# Altium PCB IPG_Rigid.PcbDoc (part 5 of 13)
Units mm, origin at the board's own origin, x right, y up, seen from the top; angles counter-clockwise.
Board outline 69.6 x 90.73 mm, 10 copper layers (TOP, DHOR, DVERT, GND 1, POWER, GND 2, GND 3, AVERT, AHOR, BOT), stack 1.198 mm thick; 745 components, 398 nets, 1997 pads, 2678 vias.
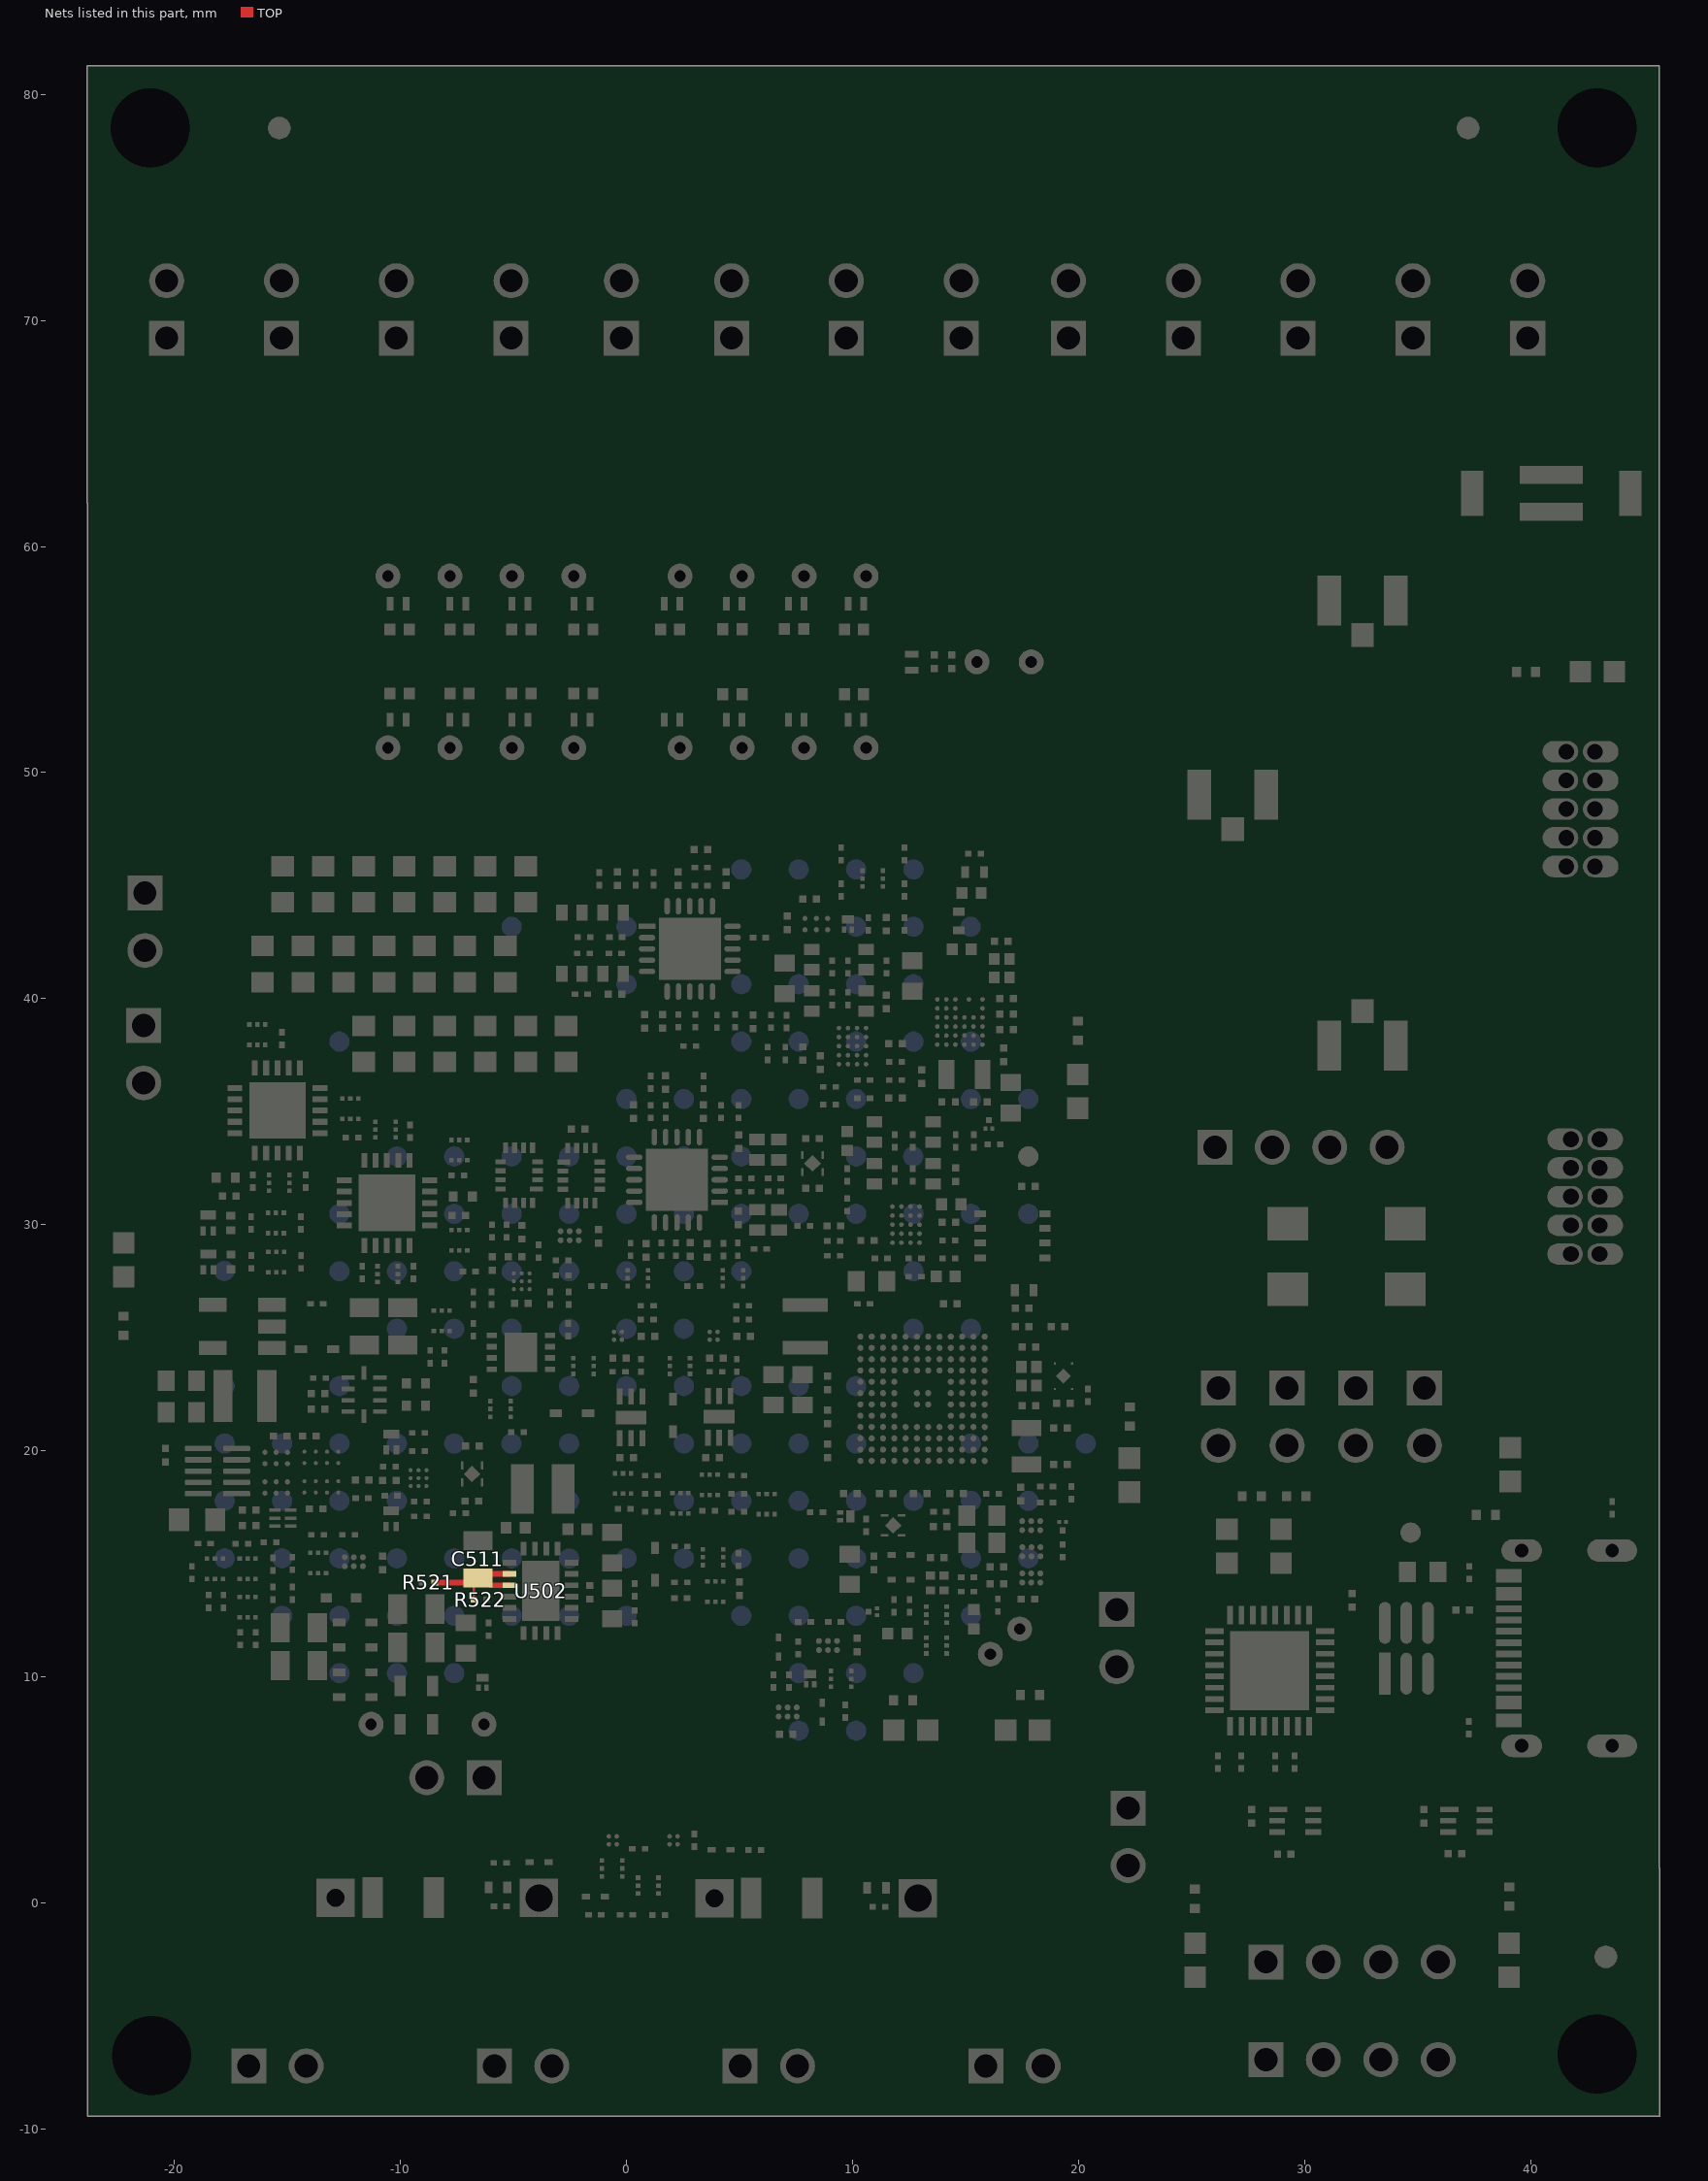
[diagram p11: the nets of this part, all layers, seen from the top]

## Part data (continued)
R502: "402 Ohms ±0.5% 0.4W Chip Resistor 0603 (1608 Metric) Automotive AEC-Q200, Pulse Withstanding Thick Film", Case/Package=0603, Manufacturer=Vishay, Max Operating Temperature=155°C, Min Operating Temperature=-55°C, Package Shape=Rectangular, Power=400mW, Supplier Part Number 1=846-SDR03EZPD4020CT-ND, Tolerance=0.5%, Category="Chip SMD Resistors", ComponentLink1Description=https://datasheet.ciiva.com:443/pdfs/VipMasterIC/IC/VISH/VISH-S-A0002932828/VISH-S-A0002932828-1.pdf?src-supplier=IHS+Markit, ComponentLink1URL=https://datasheet.ciiva.com:443/pdfs/VipMasterIC/IC/VISH/VISH-S-A0002932828/VISH-S-A0002932828-1.pdf?src-supplier=IHS+Markit, ComponentLink2Description=https://datasheet.ciiva.com/2471/crcw0201e3-2471712.pdf?src-supplier=Digikey, ComponentLink2URL=https://datasheet.ciiva.com/2471/crcw0201e3-2471712.pdf?src-supplier=Digikey, ComponentLink3Description=https://datasheet.ciiva.com/7841/1719906-7841431.pdf?src-supplier=Element14, ComponentLink3URL=https://datasheet.ciiva.com/7841/1719906-7841431.pdf?src-supplier=Element14, ComponentLink4Description=https://datasheet.ciiva.com/7841/1719906-7841430.pdf?src-supplier=Element14, ComponentLink4URL=https://datasheet.ciiva.com/7841/1719906-7841430.pdf?src-supplier=Element14, ComponentLink5Description=https://datasheet.ciiva.com/22665/1847332-22665688.pdf?src-supplier=Element14, ComponentLink5URL=https://datasheet.ciiva.com/22665/1847332-22665688.pdf?src-supplier=Element14, ComponentLink6Description=https://datasheet.ciiva.com/2471/crcw0201e3-2471713.pdf?src-supplier=Digikey, ComponentLink6URL=https://datasheet.ciiva.com/2471/crcw0201e3-2471713.pdf?src-supplier=Digikey, ComponentLink7Description=https://datasheet.ciiva.com/2471/crcw0201e3-2471711.pdf?src-supplier=Digikey, ComponentLink7URL=https://datasheet.ciiva.com/2471/crcw0201e3-2471711.pdf?src-supplier=Digikey, ComponentLink8Description=https://datasheet.ciiva.com/16757/70202042-16757849.pdf?src-supplier=Allied+Electronics, ComponentLink8URL=https://datasheet.ciiva.com/16757/70202042-16757849.pdf?src-supplier=Allied+Electronics, ComponentLink9Description=https://datasheet.ciiva.com/16436/crcw0201e3-16436237.pdf?src-supplier=Future+Electronics, ComponentLink9URL=https://datasheet.ciiva.com/16436/crcw0201e3-16436237.pdf?src-supplier=Future+Electronics, Construction=Chip, Manufacturer Part Number=SDR03EZPD4020, Mounting Technology="Surface Mount", Pins=2, RoHS=Yes, Supplier 1=DigiKey, Terminal Finish=Nickel
R505: "Fixed Resistor, Metal Glaze/thick Film, 0.05W, 2000ohm, 30V, 1% +/-Tol, 200ppm/Cel, Surface Mount, 0201", Case/Package=0201, Manufacturer="Vishay Dale", Max Operating Temperature=155°C, Medical Grade MFR=Mini-Systems, Medical Grade MFR PN=MWA96SM-4021F-NS62TR, Min Operating Temperature=-55°C, Package Height=0.23mm, Package Length=0.6mm, Package Shape=Rectangular, Package Style=SMTMeter, Package Width=0.3mm, Power=50mW, Rated Temperature=70°C, Resistor Type="FIXED RESISTOR", Supplier Part Number 1=541-2.00KABCT-ND, Temperature Coefficient=200ppm/°C, Tolerance=1%, Working Voltage=30V, Category="Chip SMD Resistors", ComponentLink1Description=https://datasheet.ciiva.com:443/pdfs/VipMasterIC/IC/VISH/VISH-S-A0002932828/VISH-S-A0002932828-1.pdf?src-supplier=IHS+Markit, ComponentLink1URL=https://datasheet.ciiva.com:443/pdfs/VipMasterIC/IC/VISH/VISH-S-A0002932828/VISH-S-A0002932828-1.pdf?src-supplier=IHS+Markit, ComponentLink2Description=https://datasheet.ciiva.com/7690/1719906-7690620.pdf?src-supplier=Element14, ComponentLink2URL=https://datasheet.ciiva.com/7690/1719906-7690620.pdf?src-supplier=Element14, ComponentLink3Description=https://datasheet.ciiva.com/7690/1719906-7690621.pdf?src-supplier=Element14, ComponentLink3URL=https://datasheet.ciiva.com/7690/1719906-7690621.pdf?src-supplier=Element14, ComponentLink4Description=https://datasheet.ciiva.com/9074/crcw0201e3-9074873.pdf?src-supplier=Avnet, ComponentLink4URL=https://datasheet.ciiva.com/9074/crcw0201e3-9074873.pdf?src-supplier=Avnet, ComponentLink5Description=https://datasheet.ciiva.com/22675/1700795-22675166.pdf?src-supplier=Element14, ComponentLink5URL=https://datasheet.ciiva.com/22675/1700795-22675166.pdf?src-supplier=Element14, Construction=Chip, JESD-609 Code=e3, Manufacturer Part Number=CRCW02012K00FNED, Mounting Technology="Surface Mount", Packaging="Tape and Reel", Pins=2, Pricing="1=0,1, 10=0,037, 50=0,0242, 100=0,0204, 500=0,01426, 1000=0,01241, 5000=0,00924 (USD)", Reach SVHC Compliant=Yes, Reference Standard=AEC-Q200, RoHS=Yes, RoHS Compliant=Yes, Stock=14472, Supplier 1=Digikey, Technology="METAL GLAZE/THICK FILM", Terminal Finish=Nickel, Termination=Wraparound
R508: "150 kOhms ±1% 0.05W, 1/20W Chip Resistor 0201 (0603 Metric) Thick Film", Case/Package=0201, Manufacturer="Vishay Dale", Max Operating Temperature=155°C, Min Operating Temperature=-55°C, Package Shape=Rectangular, Power="50 mW", Rated Temperature="70 °C", Resistor Type="FIXED RESISTOR", Supplier Part Number=541-2943-2-ND, Supplier Part Number 1=71-CRCW0201150KFKED, Temperature Coefficient=±100ppm/°C, Tolerance=1%, Category="Chip SMD Resistors", JESD-609 Code=e3, Manufacturer Part Number=CRCW0201150KFKED, Mounting Technology="Surface Mount", Packaging="Tape and Reel", Pins=2, Reach SVHC Compliant=Yes, RoHS=Yes, RoHS Compliant=Yes, Stock=109k, Supplier=Digikey, Supplier 1=Mouser
R509: "Fixed Resistor, Metal Glaze/thick Film, 0.05W, 2400000ohm, 30V, 1% +/-Tol, 200ppm/Cel, Surface Mount, 0201", Case/Package=0201, Manufacturer="Vishay Draloric", Max Operating Temperature=155°C, Medical Grade MFR=TBD, Min Operating Temperature=-55°C, Package Shape=Rectangular, Power=50mW, Rated Temperature=70°C, Resistor Type="FIXED RESISTOR", Supplier Part Number=541-CRCW02011M80FNEDCT-ND, Supplier Part Number 1=541-CRCW02012M40FNEDCT-ND, Temperature Coefficient=200ppm/°C, Tolerance=1%, Working Voltage=30V, Category="Chip SMD Resistors", ComponentLink1Description=https://datasheet.ciiva.com:443/pdfs/VipMasterIC/IC/VISH/VISH-S-A0002932828/VISH-S-A0002932828-1.pdf?src-supplier=IHS+Markit, ComponentLink1URL=https://datasheet.ciiva.com:443/pdfs/VipMasterIC/IC/VISH/VISH-S-A0002932828/VISH-S-A0002932828-1.pdf?src-supplier=IHS+Markit, ComponentLink2Description=https://datasheet.ciiva.com/7800/1719906-7800925.pdf?src-supplier=Element14, ComponentLink2URL=https://datasheet.ciiva.com/7800/1719906-7800925.pdf?src-supplier=Element14, ComponentLink3Description=https://datasheet.ciiva.com/7800/1719906-7800926.pdf?src-supplier=Element14, ComponentLink3URL=https://datasheet.ciiva.com/7800/1719906-7800926.pdf?src-supplier=Element14, ComponentLink4Description=https://datasheet.ciiva.com/22675/1700795-22675997.pdf?src-supplier=Element14, ComponentLink4URL=https://datasheet.ciiva.com/22675/1700795-22675997.pdf?src-supplier=Element14, ComponentLink5Description=https://datasheet.ciiva.com/22692/1719906-22692765.pdf?src-supplier=Element14, ComponentLink5URL=https://datasheet.ciiva.com/22692/1719906-22692765.pdf?src-supplier=Element14, JESD-609 Code=e3, Manufacturer Part Number=CRCW02012M40FNED, Medical Grade MFR PN=TBD, Mounting Technology="Surface Mount", Packaging="Tape and Reel", Pins=2, Pricing="1=0,1, 10=0,037, 50=0,0242, 100=0,0204, 500=0,01426, 1000=0,01241, 5000=0,00924 (USD)", Reach SVHC Compliant=Yes, RoHS=Yes, RoHS Compliant=Yes, Stock=32348, Supplier=Digikey, Supplier 1=Digikey, Technology="METAL GLAZE/THICK FILM", Terminal Finish=Nickel, Termination=Wraparound
R510 R511: "Fixed Resistor, Metal Glaze/thick Film, 0.05W, 1600000ohm, 30V, 1% +/-Tol, 200ppm/Cel, Surface Mount, 0201", Case/Package=0201, Manufacturer="Vishay Dale", Max Operating Temperature=155°C, Medical Grade MFR=TBD, Min Operating Temperature=-55°C, Package Shape=Rectangular, Power=50mW, Rated Temperature=70°C, Resistor Type="FIXED RESISTOR", Supplier Part Number 1=541-CRCW02011M60FNEDCT-ND, Temperature Coefficient=200ppm/°C, Tolerance=1%, Working Voltage=30V, Category="Chip SMD Resistors", ComponentLink1Description=https://datasheet.ciiva.com:443/pdfs/VipMasterIC/IC/VISH/VISH-S-A0002932828/VISH-S-A0002932828-1.pdf?src-supplier=IHS+Markit, ComponentLink1URL=https://datasheet.ciiva.com:443/pdfs/VipMasterIC/IC/VISH/VISH-S-A0002932828/VISH-S-A0002932828-1.pdf?src-supplier=IHS+Markit, ComponentLink2Description=https://datasheet.ciiva.com/7800/1719906-7800925.pdf?src-supplier=Element14, ComponentLink2URL=https://datasheet.ciiva.com/7800/1719906-7800925.pdf?src-supplier=Element14, ComponentLink3Description=https://datasheet.ciiva.com/7800/1719906-7800926.pdf?src-supplier=Element14, ComponentLink3URL=https://datasheet.ciiva.com/7800/1719906-7800926.pdf?src-supplier=Element14, ComponentLink4Description=https://datasheet.ciiva.com/22675/1700795-22675997.pdf?src-supplier=Element14, ComponentLink4URL=https://datasheet.ciiva.com/22675/1700795-22675997.pdf?src-supplier=Element14, ComponentLink5Description=https://datasheet.ciiva.com/22692/1719906-22692765.pdf?src-supplier=Element14, ComponentLink5URL=https://datasheet.ciiva.com/22692/1719906-22692765.pdf?src-supplier=Element14, JESD-609 Code=e3, Manufacturer Part Number=CRCW02011M60FNED, Medical Grade MFR PN=TBD, Mounting Technology="Surface Mount", Packaging="Tape and Reel", Pins=2, Pricing="1=0,1, 10=0,037, 50=0,0242, 100=0,0204, 500=0,01426, 1000=0,01241, 5000=0,00924 (USD)", Reach SVHC Compliant=Yes, RoHS=Yes, RoHS Compliant=Yes, Stock=32348, Supplier 1=Digikey, Technology="METAL GLAZE/THICK FILM", Terminal Finish=Nickel, Termination=Wraparound
R512 R700 R914 R1028 R1059: "Fixed Resistor, Metal Glaze/thick Film, 0.05W, 100000ohm, 30V, 1% +/-Tol, 200ppm/Cel, Surface Mount, 0201", Case/Package=0201, Manufacturer=Vishay, Max Operating Temperature=155°C, Medical Grade MFR=Mini-Systems, Medical Grade MFR PN=MWA96SM-1003F-NS62TR, Min Operating Temperature=-55°C, Package Height=0.23mm, Package Length=0.6mm, Package Shape=Rectangular, Package Style=SMTMeter, Package Width=0.3mm, Power=50mW, Rated Temperature=70°C, Resistor Type="FIXED RESISTOR", Supplier Part Number=541-100KABCT-ND, Temperature Coefficient=200ppm/°C, Tolerance=1%, Working Voltage=30V, Category="Chip SMD Resistors", ComponentLink1Description=https://datasheet.ciiva.com:443/pdfs/VipMasterIC/IC/VISH/VISH-S-A0002932828/VISH-S-A0002932828-1.pdf?src-supplier=IHS+Markit, ComponentLink1URL=https://datasheet.ciiva.com:443/pdfs/VipMasterIC/IC/VISH/VISH-S-A0002932828/VISH-S-A0002932828-1.pdf?src-supplier=IHS+Markit, ComponentLink2Description=https://datasheet.ciiva.com/2474/crcw0201e3-2474797.pdf?src-supplier=Digikey, ComponentLink2URL=https://datasheet.ciiva.com/2474/crcw0201e3-2474797.pdf?src-supplier=Digikey, ComponentLink3Description=https://datasheet.ciiva.com/2474/crcw0201e3-2474798.pdf?src-supplier=Digikey, ComponentLink3URL=https://datasheet.ciiva.com/2474/crcw0201e3-2474798.pdf?src-supplier=Digikey, ComponentLink4Description=https://datasheet.ciiva.com/2474/crcw0201e3-2474799.pdf?src-supplier=Digikey, ComponentLink4URL=https://datasheet.ciiva.com/2474/crcw0201e3-2474799.pdf?src-supplier=Digikey, ComponentLink5Description=https://datasheet.ciiva.com/16436/dcrcwe3-16436220.pdf?src-supplier=Future+Electronics, ComponentLink5URL=https://datasheet.ciiva.com/16436/dcrcwe3-16436220.pdf?src-supplier=Future+Electronics, ComponentLink6Description=https://datasheet.ciiva.com/28634/1847332-28634462.pdf?src-supplier=Element14, ComponentLink6URL=https://datasheet.ciiva.com/28634/1847332-28634462.pdf?src-supplier=Element14, ComponentLink7Description=https://datasheet.ciiva.com/22665/1700795-22665689.pdf?src-supplier=Element14, ComponentLink7URL=https://datasheet.ciiva.com/22665/1700795-22665689.pdf?src-supplier=Element14, ComponentLink8Description=https://datasheet.ciiva.com/22870/70202042-22870476.pdf?src-supplier=Allied+Electronics, ComponentLink8URL=https://datasheet.ciiva.com/22870/70202042-22870476.pdf?src-supplier=Allied+Electronics, ComponentLink9Description=https://datasheet.ciiva.com/16777/70202042-16777655.pdf?src-supplier=Allied+Electronics, ComponentLink9URL=https://datasheet.ciiva.com/16777/70202042-16777655.pdf?src-supplier=Allied+Electronics, Construction=Chip, JESD-609 Code=e3, Manufacturer Part Number=CRCW0201100KFNED, Mounting Technology="Surface Mount", Packaging="Tape and Reel", Pins=2, Pricing="1=0,1, 10=0,037, 50=0,0242, 100=0,0204, 500=0,01426, 1000=0,01241, 5000=0,00924 (USD)", Reach SVHC Compliant=Yes, Reference Standard=AEC-Q200, RoHS=Yes, RoHS Compliant=Yes, Stock=8252, Supplier=Digikey, Supplier 1=Digikey, Supplier Part Number 1=541-100KABCT-ND, Technology="METAL GLAZE/THICK FILM", Terminal Finish=Nickel, Termination=Wraparound
R516 R518 R520: "Fixed Resistor, Metal Glaze/thick Film, 0.05W, 49900ohm, 30V, 1% +/-Tol, 200ppm/Cel, Surface Mount, 0201", Case/Package=0201, Manufacturer=Vishay, Max Operating Temperature=155°C, Medical Grade MFR=Mini-Systems, Medical Grade MFR PN=MWA96SM-4992F-NS62TR, Min Operating Temperature=-55°C, Package Height=0.23mm, Package Length=0.6mm, Package Shape=Rectangular, Package Style=SMTMeter, Package Width=0.3mm, Power=50mW, Rated Temperature=70°C, Resistor Type="FIXED RESISTOR", Supplier Part Number=541-49.9KABCT-ND, Temperature Coefficient=200ppm/°C, Tolerance=1%, Working Voltage=30V, Category="Chip SMD Resistors", ComponentLink1Description=https://datasheet.ciiva.com:443/pdfs/VipMasterIC/IC/VISH/VISH-S-A0002932828/VISH-S-A0002932828-1.pdf?src-supplier=IHS+Markit, ComponentLink1URL=https://datasheet.ciiva.com:443/pdfs/VipMasterIC/IC/VISH/VISH-S-A0002932828/VISH-S-A0002932828-1.pdf?src-supplier=IHS+Markit, ComponentLink2Description=https://datasheet.ciiva.com/7673/1719906-7673210.pdf?src-supplier=Element14, ComponentLink2URL=https://datasheet.ciiva.com/7673/1719906-7673210.pdf?src-supplier=Element14, ComponentLink3Description=https://datasheet.ciiva.com/7673/1719906-7673209.pdf?src-supplier=Element14, ComponentLink3URL=https://datasheet.ciiva.com/7673/1719906-7673209.pdf?src-supplier=Element14, ComponentLink4Description=https://datasheet.ciiva.com/22643/1635184-22643438.pdf?src-supplier=Element14, ComponentLink4URL=https://datasheet.ciiva.com/22643/1635184-22643438.pdf?src-supplier=Element14, ComponentLink5Description=https://datasheet.ciiva.com/7172/1635184-7172907.pdf?src-supplier=Newark, ComponentLink5URL=https://datasheet.ciiva.com/7172/1635184-7172907.pdf?src-supplier=Newark, ComponentLink6Description=https://datasheet.ciiva.com/16208/dcrcwe3-16208758.pdf?src-supplier=Future+Electronics, ComponentLink6URL=https://datasheet.ciiva.com/16208/dcrcwe3-16208758.pdf?src-supplier=Future+Electronics, Construction=Chip, JESD-609 Code=e3, Manufacturer Part Number=CRCW020149K9FNED, Mounting Technology="Surface Mount", Packaging="Tape and Reel", Pins=2, Pricing="1=0,1, 10=0,037, 50=0,0242, 100=0,0204, 500=0,01426, 1000=0,01241, 5000=0,00924 (USD)", Reach SVHC Compliant=Yes, Reference Standard=AEC-Q200, RoHS=Yes, RoHS Compliant=Yes, Stock=25072, Supplier=Digikey, Supplier 1=Digikey, Supplier Part Number 1=541-49.9KABCT-ND, Technology="METAL GLAZE/THICK FILM", Terminal Finish=Nickel, Termination=Wraparound
R524 R1035 R1040: "Fixed Resistor, Metal Glaze/thick Film, 0.05W, 6800000ohm, 30V, 1% +/-Tol, 200ppm/Cel, Surface Mount, 0201", Case/Package=0201, Manufacturer="Vishay Draloric", Max Operating Temperature=155°C, Medical Grade MFR=TBD, Min Operating Temperature=-55°C, Package Shape=Rectangular, Power=50mW, Rated Temperature=70°C, Resistor Type="FIXED RESISTOR", Supplier Part Number=541-CRCW02016M80FNEDCT-ND, Temperature Coefficient=200ppm/°C, Tolerance=1%, Working Voltage=30V, Category="Chip SMD Resistors", ComponentLink1Description=https://datasheet.ciiva.com:443/pdfs/VipMasterIC/IC/VISH/VISH-S-A0002932828/VISH-S-A0002932828-1.pdf?src-supplier=IHS+Markit, ComponentLink1URL=https://datasheet.ciiva.com:443/pdfs/VipMasterIC/IC/VISH/VISH-S-A0002932828/VISH-S-A0002932828-1.pdf?src-supplier=IHS+Markit, ComponentLink2Description=https://datasheet.ciiva.com/22682/1700795-22682637.pdf?src-supplier=Element14, ComponentLink2URL=https://datasheet.ciiva.com/22682/1700795-22682637.pdf?src-supplier=Element14, JESD-609 Code=e3, Manufacturer Part Number=CRCW02016M80FNED, Medical Grade MFR PN=TBD, Mounting Technology="Surface Mount", Packaging="Tape and Reel", Pins=2, Pricing="1=0,1, 10=0,037, 50=0,0242, 100=0,0204, 500=0,01426, 1000=0,01241, 5000=0,00924 (USD)", Reach SVHC Compliant=Yes, RoHS=Yes, RoHS Compliant=Yes, Stock=8955, Supplier=Digikey, Supplier 1=Digikey, Supplier Part Number 1=541-CRCW02016M80FNEDCT-ND, Technology="METAL GLAZE/THICK FILM", Terminal Finish=Nickel, Termination=Wraparound
R605 R618: "Fixed Resistor, Metal Glaze/thick Film, 0.05W, 4020ohm, 30V, 1% +/-Tol, 200ppm/Cel, Surface Mount, 0201", Case/Package=0201, Manufacturer=Vishay, Max Operating Temperature=155°C, Medical Grade MFR=Mini-Systems, Medical Grade MFR PN=MWA96SM-4021F-NS62TR, Min Operating Temperature=-55°C, Package Height=0.23mm, Package Length=0.6mm, Package Shape=Rectangular, Package Style=SMTMeter, Package Width=0.3mm, Power=50mW, Rated Temperature=70°C, Resistor Type="FIXED RESISTOR", Supplier Part Number=541-CRCW02014K02FNEDCT-ND, Temperature Coefficient=200ppm/°C, Tolerance=1%, Working Voltage=30V, Category="Chip SMD Resistors", ComponentLink1Description=https://datasheet.ciiva.com:443/pdfs/VipMasterIC/IC/VISH/VISH-S-A0002932828/VISH-S-A0002932828-1.pdf?src-supplier=IHS+Markit, ComponentLink1URL=https://datasheet.ciiva.com:443/pdfs/VipMasterIC/IC/VISH/VISH-S-A0002932828/VISH-S-A0002932828-1.pdf?src-supplier=IHS+Markit, ComponentLink2Description=https://datasheet.ciiva.com/7690/1719906-7690620.pdf?src-supplier=Element14, ComponentLink2URL=https://datasheet.ciiva.com/7690/1719906-7690620.pdf?src-supplier=Element14, ComponentLink3Description=https://datasheet.ciiva.com/7690/1719906-7690621.pdf?src-supplier=Element14, ComponentLink3URL=https://datasheet.ciiva.com/7690/1719906-7690621.pdf?src-supplier=Element14, ComponentLink4Description=https://datasheet.ciiva.com/9074/crcw0201e3-9074873.pdf?src-supplier=Avnet, ComponentLink4URL=https://datasheet.ciiva.com/9074/crcw0201e3-9074873.pdf?src-supplier=Avnet, ComponentLink5Description=https://datasheet.ciiva.com/22675/1700795-22675166.pdf?src-supplier=Element14, ComponentLink5URL=https://datasheet.ciiva.com/22675/1700795-22675166.pdf?src-supplier=Element14, Construction=Chip, JESD-609 Code=e3, Manufacturer Part Number=CRCW02014K02FNED, Mounting Technology="Surface Mount", Packaging="Tape and Reel", Pins=2, Pricing="1=0,1, 10=0,037, 50=0,0242, 100=0,0204, 500=0,01426, 1000=0,01241, 5000=0,00924 (USD)", Reach SVHC Compliant=Yes, Reference Standard=AEC-Q200, RoHS=Yes, RoHS Compliant=Yes, Stock=14472, Supplier=Digikey, Supplier 1=Digikey, Supplier Part Number 1=541-CRCW02014K02FNEDCT-ND, Technology="METAL GLAZE/THICK FILM", Terminal Finish=Nickel, Termination=Wraparound
R606 R619: "Fixed Resistor, Metal Glaze/thick Film, 0.05W, 7500ohm, 30V, 1% +/-Tol, 200ppm/Cel, Surface Mount, 0201", Case/Package=0201, Manufacturer=Vishay, Max Operating Temperature=155°C, Medical Grade MFR=Mini-Systems, Medical Grade MFR PN=MWA96SM-7501F-NS62TR, Min Operating Temperature=-55°C, Package Height=0.23mm, Package Length=0.6mm, Package Shape=Rectangular, Package Style=SMTMeter, Package Width=0.3mm, Power=50mW, Rated Temperature=70°C, Resistor Type="FIXED RESISTOR", Supplier Part Number=541-7.50KABCT-ND, Temperature Coefficient=200ppm/°C, Tolerance=1%, Working Voltage=30V, Category="Chip SMD Resistors", ComponentLink1Description=https://datasheet.ciiva.com:443/pdfs/VipMasterIC/IC/VISH/VISH-S-A0002932828/VISH-S-A0002932828-1.pdf?src-supplier=IHS+Markit, ComponentLink1URL=https://datasheet.ciiva.com:443/pdfs/VipMasterIC/IC/VISH/VISH-S-A0002932828/VISH-S-A0002932828-1.pdf?src-supplier=IHS+Markit, ComponentLink2Description=https://datasheet.ciiva.com/2474/crcw0201e3-2474815.pdf?src-supplier=Digikey, ComponentLink2URL=https://datasheet.ciiva.com/2474/crcw0201e3-2474815.pdf?src-supplier=Digikey, ComponentLink3Description=https://datasheet.ciiva.com/2474/crcw0201e3-2474816.pdf?src-supplier=Digikey, ComponentLink3URL=https://datasheet.ciiva.com/2474/crcw0201e3-2474816.pdf?src-supplier=Digikey, ComponentLink4Description=https://datasheet.ciiva.com/2474/crcw0201e3-2474817.pdf?src-supplier=Digikey, ComponentLink4URL=https://datasheet.ciiva.com/2474/crcw0201e3-2474817.pdf?src-supplier=Digikey, ComponentLink5Description=https://datasheet.ciiva.com/9058/crcw0201e3-9058555.pdf?src-supplier=Avnet, ComponentLink5URL=https://datasheet.ciiva.com/9058/crcw0201e3-9058555.pdf?src-supplier=Avnet, ComponentLink6Description=https://datasheet.ciiva.com/7679/1719906-7679036.pdf?src-supplier=Element14, ComponentLink6URL=https://datasheet.ciiva.com/7679/1719906-7679036.pdf?src-supplier=Element14, ComponentLink7Description=https://datasheet.ciiva.com/7679/1719906-7679037.pdf?src-supplier=Element14, ComponentLink7URL=https://datasheet.ciiva.com/7679/1719906-7679037.pdf?src-supplier=Element14, ComponentLink8Description=https://datasheet.ciiva.com/22704/1719906-22704599.pdf?src-supplier=Element14, ComponentLink8URL=https://datasheet.ciiva.com/22704/1719906-22704599.pdf?src-supplier=Element14, Construction=Chip, JESD-609 Code=e3, Manufacturer Part Number=CRCW02017K50FNED, Mounting Technology="Surface Mount", Packaging="Tape and Reel", Pins=2, Pricing="1=0,1, 10=0,037, 50=0,0242, 100=0,0204, 500=0,01426, 1000=0,01241, 5000=0,00924 (USD)", Reach SVHC Compliant=Yes, Reference Standard=AEC-Q200, RoHS=Yes, RoHS Compliant=Yes, Stock=42220, Supplier=Digikey, Supplier 1=Digikey, Supplier Part Number 1=541-7.50KABCT-ND, Technology="METAL GLAZE/THICK FILM", Terminal Finish=Nickel, Termination=Wraparound
R607 R621: "Resistor, 1M, 0.1%, 0201", Manufacturer=Yageo, Medical Grade MFR=TBD, Rating=25V, Supplier Part Number 1=13-RE0201BRE071MLCT-ND, Category=Resistor, Length (mm)=0.6, Manufacturer Part Number=RE0201BRE071ML, Medical Grade MFR PN=TBD, PCB Footprint=res0201_reduced, Precision=0.1%, Supplier 1=Digikey, Supplier 2=Digikey, Supplier 3=Digikey, Supplier 4=Mouser, Supplier Part Number 2=13-RE0201BRE071MLDKR-ND, Supplier Part Number 3=13-RE0201BRE071MLTR-ND, Supplier Part Number 4=603-RE0201BRE071ML, Thickness (mm)=0.23, Width (mm)=0.3
R610 R622: "Resistor, 390k, 0.1%, 0201", Manufacturer=Kamaya, Medical Grade MFR=TBD, Rating=25V, Supplier Part Number 1=2315-RGC1/20C3903BPATR-ND, Category=Resistor, Length (mm)=0.6, Manufacturer Part Number=RGC1/20C3903BPA, Medical Grade MFR PN=TBD, PCB Footprint=res0201_reduced, Precision=0.1%, Supplier 1=Digikey, Supplier 2=Mouser, Supplier Part Number 2=791-RGC1/20C3903BPA, Thickness (mm)=0.23, Width (mm)=0.3
R620 R623: "Fixed Resistor, Metal Glaze/thick Film, 0.05W, 5100000ohm, 30V, 1% +/-Tol, 200ppm/Cel, Surface Mount, 0201", Case/Package=0201, Manufacturer="Vishay Draloric", Manufacturer Series=CRCW0201E3, Max Operating Temperature=155°C, Medical Grade MFR=TBD, Min Operating Temperature=-55°C, Package Shape=Rectangular, Power=50mW, Rated Temperature=70°C, Resistor Type="FIXED RESISTOR", Supplier Part Number=541-CRCW02015M10FNEDCT-ND, Temperature Coefficient=200ppm/°C, Tolerance=1%, Working Voltage=30V, Category="Chip SMD Resistors", ComponentLink1Description=https://datasheet.ciiva.com:443/pdfs/VipMasterIC/IC/VISH/VISH-S-A0002932828/VISH-S-A0002932828-1.pdf?src-supplier=IHS+Markit, ComponentLink1URL=https://datasheet.ciiva.com:443/pdfs/VipMasterIC/IC/VISH/VISH-S-A0002932828/VISH-S-A0002932828-1.pdf?src-supplier=IHS+Markit, ComponentLink2Description=https://datasheet.ciiva.com/7843/1719906-7843192.pdf?src-supplier=Element14, ComponentLink2URL=https://datasheet.ciiva.com/7843/1719906-7843192.pdf?src-supplier=Element14, ComponentLink3Description=https://datasheet.ciiva.com/7843/1719906-7843193.pdf?src-supplier=Element14, ComponentLink3URL=https://datasheet.ciiva.com/7843/1719906-7843193.pdf?src-supplier=Element14, ComponentLink4Description=https://datasheet.ciiva.com/6073/1719906-6073775.pdf?src-supplier=Farnell, ComponentLink4URL=https://datasheet.ciiva.com/6073/1719906-6073775.pdf?src-supplier=Farnell, JESD-609 Code=e3, Manufacturer Part Number=CRCW02015M10FNED, Medical Grade MFR PN=TBD, Mounting Technology="Surface Mount", Packaging="Tape and Reel", Pins=2, Pricing="1=0,1, 10=0,037, 50=0,0242, 100=0,0204, 500=0,01426, 1000=0,01241, 5000=0,00924 (USD)", Reach SVHC Compliant=Yes, RoHS=Yes, RoHS Compliant=Yes, Stock=56300, Supplier=Digikey, Supplier 1=Digikey, Supplier Part Number 1=541-CRCW02015M10FNEDCT-ND, Technology="METAL GLAZE/THICK FILM", Terminal Finish=Nickel, Termination=Wraparound
R701 R1148 R1151: "Fixed Resistor, Metal Glaze/thick Film, 0.05W, 100ohm, 30V, 1% +/-Tol, 200ppm/Cel, Surface Mount, 0201", Case/Package=0201, Manufacturer=Vishay, Max Operating Temperature=155°C, Medical Grade MFR=Mini-Systems, Medical Grade MFR PN=MWA96SM-1000F-NS62TR, Min Operating Temperature=-55°C, Package Height=0.23mm, Package Length=0.6mm, Package Shape=Rectangular, Package Style=SMTMeter, Package Width=0.3mm, Power=50mW, Rated Temperature=70°C, Resistor Type="FIXED RESISTOR", Supplier Part Number=541-100ABCT-ND, Temperature Coefficient=200ppm/°C, Tolerance=1%, Working Voltage=30V, Category="Chip SMD Resistors", ComponentLink1Description=https://datasheet.ciiva.com:443/pdfs/VipMasterIC/IC/VISH/VISH-S-A0002932828/VISH-S-A0002932828-1.pdf?src-supplier=IHS+Markit, ComponentLink1URL=https://datasheet.ciiva.com:443/pdfs/VipMasterIC/IC/VISH/VISH-S-A0002932828/VISH-S-A0002932828-1.pdf?src-supplier=IHS+Markit, ComponentLink2Description=https://datasheet.ciiva.com/8083/crcw0201e3-8083961.pdf?src-supplier=Avnet, ComponentLink2URL=https://datasheet.ciiva.com/8083/crcw0201e3-8083961.pdf?src-supplier=Avnet, ComponentLink3Description=https://datasheet.ciiva.com/2527/crcw0201e3-2527593.pdf?src-supplier=Digikey, ComponentLink3URL=https://datasheet.ciiva.com/2527/crcw0201e3-2527593.pdf?src-supplier=Digikey, ComponentLink4Description=https://datasheet.ciiva.com/2527/crcw0201e3-2527591.pdf?src-supplier=Digikey, ComponentLink4URL=https://datasheet.ciiva.com/2527/crcw0201e3-2527591.pdf?src-supplier=Digikey, ComponentLink5Description=https://datasheet.ciiva.com/2527/crcw0201e3-2527592.pdf?src-supplier=Digikey, ComponentLink5URL=https://datasheet.ciiva.com/2527/crcw0201e3-2527592.pdf?src-supplier=Digikey, ComponentLink6Description=https://datasheet.ciiva.com/7983/1719906-7983317.pdf?src-supplier=Element14, ComponentLink6URL=https://datasheet.ciiva.com/7983/1719906-7983317.pdf?src-supplier=Element14, ComponentLink7Description=https://datasheet.ciiva.com/7983/1719906-7983318.pdf?src-supplier=Element14, ComponentLink7URL=https://datasheet.ciiva.com/7983/1719906-7983318.pdf?src-supplier=Element14, ComponentLink8Description=https://datasheet.ciiva.com/16757/70202042-16757607.pdf?src-supplier=Allied+Electronics, ComponentLink8URL=https://datasheet.ciiva.com/16757/70202042-16757607.pdf?src-supplier=Allied+Electronics, ComponentLink9Description=https://datasheet.ciiva.com/16202/dcrcwe3-16202605.pdf?src-supplier=Future+Electronics, ComponentLink9URL=https://datasheet.ciiva.com/16202/dcrcwe3-16202605.pdf?src-supplier=Future+Electronics, ComponentLink10Description=https://datasheet.ciiva.com/22665/1700795-22665690.pdf?src-supplier=Element14, ComponentLink10URL=https://datasheet.ciiva.com/22665/1700795-22665690.pdf?src-supplier=Element14, Construction=Chip, JESD-609 Code=e3, Manufacturer Part Number=CRCW0201100RFNED, Mounting Technology="Surface Mount", Packaging="Tape and Reel", Pins=2, Pricing="1=0,1, 10=0,037, 50=0,0242, 100=0,0204, 500=0,01426, 1000=0,01241, 5000=0,00924 (USD)", Reach SVHC Compliant=Yes, Reference Standard=AEC-Q200, RoHS=Yes, RoHS Compliant=Yes, Stock=52904, Supplier=Digikey, Supplier 1=Digikey, Supplier Part Number 1=541-100ABCT-ND, Technology="METAL GLAZE/THICK FILM", Terminal Finish=Nickel, Termination=Wraparound
R706: "Fixed Resistor, Metal Glaze/thick Film, 0.05W, 340000ohm, 30V, 1% +/-Tol, 200ppm/Cel, Surface Mount, 0201", Case/Package=0201, Manufacturer=Vishay, Max Operating Temperature=155°C, Medical Grade MFR=Mini-Systems, Medical Grade MFR PN=MWA96SM-3403F-NS62TR, Min Operating Temperature=-55°C, Package Height=0.23mm, Package Length=0.6mm, Package Shape=Rectangular, Package Style=SMTMeter, Package Width=0.3mm, Power=50mW, Rated Temperature=70°C, Resistor Type="FIXED RESISTOR", Supplier Part Number=541-340KAABDKR-ND, Supplier Part Number 1=541-340KAABCT-ND, Temperature Coefficient=200ppm/°C, Tolerance=1%, Working Voltage=30V, Category="Chip SMD Resistors", ComponentLink1Description=https://datasheet.ciiva.com:443/pdfs/VipMasterIC/IC/VISH/VISH-S-A0002932828/VISH-S-A0002932828-1.pdf?src-supplier=IHS+Markit, ComponentLink1URL=https://datasheet.ciiva.com:443/pdfs/VipMasterIC/IC/VISH/VISH-S-A0002932828/VISH-S-A0002932828-1.pdf?src-supplier=IHS+Markit, ComponentLink2Description=https://datasheet.ciiva.com/2577/crcw0201e3-2577344.pdf?src-supplier=Digikey, ComponentLink2URL=https://datasheet.ciiva.com/2577/crcw0201e3-2577344.pdf?src-supplier=Digikey, ComponentLink3Description=https://datasheet.ciiva.com/8944/crcw0201e3-8944076.pdf?src-supplier=Avnet, ComponentLink3URL=https://datasheet.ciiva.com/8944/crcw0201e3-8944076.pdf?src-supplier=Avnet, ComponentLink4Description=https://datasheet.ciiva.com/7673/1719906-7673960.pdf?src-supplier=Element14, ComponentLink4URL=https://datasheet.ciiva.com/7673/1719906-7673960.pdf?src-supplier=Element14, ComponentLink5Description=https://datasheet.ciiva.com/7673/1719906-7673961.pdf?src-supplier=Element14, ComponentLink5URL=https://datasheet.ciiva.com/7673/1719906-7673961.pdf?src-supplier=Element14, ComponentLink6Description=https://datasheet.ciiva.com/22706/1719906-22706187.pdf?src-supplier=Element14, ComponentLink6URL=https://datasheet.ciiva.com/22706/1719906-22706187.pdf?src-supplier=Element14, ComponentLink7Description=https://datasheet.ciiva.com/22675/1700795-22675861.pdf?src-supplier=Element14, ComponentLink7URL=https://datasheet.ciiva.com/22675/1700795-22675861.pdf?src-supplier=Element14, Construction=Chip, JESD-609 Code=e3, Manufacturer Part Number=CRCW0201340KFKED, Mounting Technology="Surface Mount", Packaging="Tape and Reel", Pins=2, Pricing="1=0,1, 10=0,037, 50=0,0242, 100=0,0204, 500=0,01426, 1000=0,01241, 5000=0,00924 (USD)", Reach SVHC Compliant=Yes, Reference Standard=AEC-Q200, RoHS=Yes, RoHS Compliant=Yes, Supplier=Digikey, Supplier 1=Digikey, Technology="METAL GLAZE/THICK FILM", Terminal Finish=Nickel, Termination=Wraparound
R707 R708: library part RES_DNP_0402, Manufacturer=N/A, Category=Resistor, Length (mm)="1.12 ±0.10", Manufacturer PN=N/A, Medical Grade MFR=N/A, Medical Grade MFR PN=N/A, PCB Footprint=res0402_reduced, Rating=N/A, Review=020823, Status=Approved, Thickness (mm)="0.33 ±0.08", Width (mm)="0.56 ±0.08"
R711: "Fixed Resistor, Metal Glaze/thick Film, 0.05W, 40200ohm, 30V, 1% +/-Tol, 200ppm/Cel, Surface Mount, 0201", Case/Package=0201, Manufacturer=Vishay, Max Operating Temperature=155°C, Medical Grade MFR=Mini-Systems, Medical Grade MFR PN=MWA96SM-4022F-NS62TR, Min Operating Temperature=-55°C, Package Height=0.23mm, Package Length=0.6mm, Package Shape=Rectangular, Package Style=SMTMeter, Package Width=0.3mm, Power=50mW, Rated Temperature=70°C, Resistor Type="FIXED RESISTOR", Supplier Part Number=541-CRCW020140K2FNEDCT-ND, Temperature Coefficient=200ppm/°C, Tolerance=1%, Working Voltage=30V, Category="Chip SMD Resistors", ComponentLink1Description=https://datasheet.ciiva.com:443/pdfs/VipMasterIC/IC/VISH/VISH-S-A0002932828/VISH-S-A0002932828-1.pdf?src-supplier=IHS+Markit, ComponentLink1URL=https://datasheet.ciiva.com:443/pdfs/VipMasterIC/IC/VISH/VISH-S-A0002932828/VISH-S-A0002932828-1.pdf?src-supplier=IHS+Markit, ComponentLink2Description=https://datasheet.ciiva.com/7671/1719906-7671543.pdf?src-supplier=Element14, ComponentLink2URL=https://datasheet.ciiva.com/7671/1719906-7671543.pdf?src-supplier=Element14, ComponentLink3Description=https://datasheet.ciiva.com/7671/1719906-7671544.pdf?src-supplier=Element14, ComponentLink3URL=https://datasheet.ciiva.com/7671/1719906-7671544.pdf?src-supplier=Element14, ComponentLink4Description=https://datasheet.ciiva.com/2577/crcw0201e3-2577288.pdf?src-supplier=Digikey, ComponentLink4URL=https://datasheet.ciiva.com/2577/crcw0201e3-2577288.pdf?src-supplier=Digikey, ComponentLink5Description=https://datasheet.ciiva.com/6000/1719906-6000661.pdf?src-supplier=Farnell, ComponentLink5URL=https://datasheet.ciiva.com/6000/1719906-6000661.pdf?src-supplier=Farnell, ComponentLink6Description=https://datasheet.ciiva.com/22705/1719906-22705803.pdf?src-supplier=Element14, ComponentLink6URL=https://datasheet.ciiva.com/22705/1719906-22705803.pdf?src-supplier=Element14, Construction=Chip, JESD-609 Code=e3, Manufacturer Part Number=CRCW020140K2FNED, Mounting Technology="Surface Mount", Packaging="Tape and Reel", Pins=2, Pricing="1=0,1, 10=0,037, 50=0,0242, 100=0,0204, 500=0,01426, 1000=0,01241, 5000=0,00924 (USD)", Reach SVHC Compliant=Yes, Reference Standard=AEC-Q200, RoHS=Yes, RoHS Compliant=Yes, Stock=24960, Supplier=Digikey, Supplier 1=Digikey, Supplier Part Number 1=541-CRCW020140K2FNEDCT-ND, Technology="METAL GLAZE/THICK FILM", Terminal Finish=Nickel, Termination=Wraparound
R715 R805: "Resistor 330 1%, 0402, Non Implant-grade", Manufacturer=Vishay, Medical Grade Manufacturer=None, Supplier Part Number=TBD, Supplier Part Number 1=RMCF0402FT330R, Temperature Coefficient="100 ppm/°C", Tolerance=1%, Voltage Rating=50V, Category=Resistor, Height=0.3mm, Length=1mm, Manufacturer Part Number=CRCW0402200RFKEDHP, Medical Grade Manufacturer Part Number=None, Size Code=0402, Supplier=TBD, Supplier 1=Avnet, Width=0.5mm
R716 R717: library part CRCW0201100KFNED, "Fixed Resistor, Metal Glaze/thick Film, 0.05W, 100000ohm, 30V, 1% +/-Tol, 200ppm/Cel, Surface Mount, 0201", Case/Package=0201, Manufacturer="Vishay Draloric", Max Operating Temperature=155°C, Medical Grade MFR=Mini-Systems, Medical Grade MFR PN=MWA96SM-1005F-NS62TR, Min Operating Temperature=-55°C, Package Shape=Rectangular, Power=50mW, Rated Temperature=70°C, Resistor Type="FIXED RESISTOR", Supplier Part Number=71-CRCW020110M0FNED, Supplier Part Number 1=541-CRCW020110M0FNEDCT-ND, Temperature Coefficient=200ppm/°C, Tolerance=1%, Working Voltage=30V, Category="Chip SMD Resistors", ComponentLink1Description=https://datasheet.ciiva.com:443/pdfs/VipMasterIC/IC/VISH/VISH-S-A0002932828/VISH-S-A0002932828-1.pdf?src-supplier=IHS+Markit, ComponentLink1URL=https://datasheet.ciiva.com:443/pdfs/VipMasterIC/IC/VISH/VISH-S-A0002932828/VISH-S-A0002932828-1.pdf?src-supplier=IHS+Markit, ComponentLink2Description=https://datasheet.ciiva.com/7673/1719906-7673177.pdf?src-supplier=Element14, ComponentLink2URL=https://datasheet.ciiva.com/7673/1719906-7673177.pdf?src-supplier=Element14, ComponentLink3Description=https://datasheet.ciiva.com/7673/1719906-7673178.pdf?src-supplier=Element14, ComponentLink3URL=https://datasheet.ciiva.com/7673/1719906-7673178.pdf?src-supplier=Element14, ComponentLink4Description=https://datasheet.ciiva.com/22692/1719906-22692711.pdf?src-supplier=Element14, ComponentLink4URL=https://datasheet.ciiva.com/22692/1719906-22692711.pdf?src-supplier=Element14, ComponentLink5Description=https://datasheet.ciiva.com/22665/1700795-22665701.pdf?src-supplier=Element14, ComponentLink5URL=https://datasheet.ciiva.com/22665/1700795-22665701.pdf?src-supplier=Element14, JESD-609 Code=e3, Manufacturer Part Number=CRCW020110M0FNED, Mounting Technology="Surface Mount", Packaging="Tape and Reel", Pins=2, Pricing="1=0,1, 10=0,024, 50=0,024, 100=0,014, 1000=0,011, 10000=0,006 (USD)", Reach SVHC Compliant=Yes, RoHS=Yes, RoHS Compliant=Yes, Stock=159754, Supplier=Mouser, Supplier 1=Digikey, Technology="METAL GLAZE/THICK FILM", Terminal Finish=Nickel, Termination=Wraparound
R800: "Fixed Resistor, Metal Glaze/thick Film, 0.05W, 4700000ohm, 30V, 1% +/-Tol, 200ppm/Cel, Surface Mount, 0201", Case/Package=0201, Manufacturer="Vishay Dale", Manufacturer Series=CRCW0201E3, Max Operating Temperature=155°C, Medical Grade MFR=TBD, Min Operating Temperature=-55°C, Package Shape=Rectangular, Power=50mW, Rated Temperature=70°C, Resistor Type="FIXED RESISTOR", Supplier Part Number=541-CRCW02015M10FNEDCT-ND, Supplier Part Number 1=541-CRCW02014M70FNEDCT-ND, Temperature Coefficient=200ppm/°C, Tolerance=1%, Working Voltage=30V, Category="Chip SMD Resistors", ComponentLink1Description=https://datasheet.ciiva.com:443/pdfs/VipMasterIC/IC/VISH/VISH-S-A0002932828/VISH-S-A0002932828-1.pdf?src-supplier=IHS+Markit, ComponentLink1URL=https://datasheet.ciiva.com:443/pdfs/VipMasterIC/IC/VISH/VISH-S-A0002932828/VISH-S-A0002932828-1.pdf?src-supplier=IHS+Markit, ComponentLink2Description=https://datasheet.ciiva.com/7843/1719906-7843192.pdf?src-supplier=Element14, ComponentLink2URL=https://datasheet.ciiva.com/7843/1719906-7843192.pdf?src-supplier=Element14, ComponentLink3Description=https://datasheet.ciiva.com/7843/1719906-7843193.pdf?src-supplier=Element14, ComponentLink3URL=https://datasheet.ciiva.com/7843/1719906-7843193.pdf?src-supplier=Element14, ComponentLink4Description=https://datasheet.ciiva.com/6073/1719906-6073775.pdf?src-supplier=Farnell, ComponentLink4URL=https://datasheet.ciiva.com/6073/1719906-6073775.pdf?src-supplier=Farnell, JESD-609 Code=e3, Manufacturer Part Number=CRCW02014M70FNED, Medical Grade MFR PN=TBD, Mounting Technology="Surface Mount", Packaging="Tape and Reel", Pins=2, Pricing="1=0,1, 10=0,037, 50=0,0242, 100=0,0204, 500=0,01426, 1000=0,01241, 5000=0,00924 (USD)", Reach SVHC Compliant=Yes, RoHS=Yes, RoHS Compliant=Yes, Stock=56300, Supplier=Digikey, Supplier 1=Digikey, Technology="METAL GLAZE/THICK FILM", Terminal Finish=Nickel, Termination=Wraparound
R801 R804: library part CRCW020110M0FNED, "Fixed Resistor, Metal Glaze/thick Film, 0.05W, 100000ohm, 30V, 1% +/-Tol, 200ppm/Cel, Surface Mount, 0201", Case/Package=0201, Manufacturer="Vishay Draloric", Max Operating Temperature=155°C, Medical Grade MFR=Mini-Systems, Medical Grade MFR PN=MWA96SM-1005F-NS62TR, Min Operating Temperature=-55°C, Package Shape=Rectangular, Power=50mW, Rated Temperature=70°C, Resistor Type="FIXED RESISTOR", Supplier Part Number=71-CRCW020110M0FNED, Temperature Coefficient=200ppm/°C, Tolerance=1%, Working Voltage=30V, Category="Chip SMD Resistors", ComponentLink1Description=https://datasheet.ciiva.com:443/pdfs/VipMasterIC/IC/VISH/VISH-S-A0002932828/VISH-S-A0002932828-1.pdf?src-supplier=IHS+Markit, ComponentLink1URL=https://datasheet.ciiva.com:443/pdfs/VipMasterIC/IC/VISH/VISH-S-A0002932828/VISH-S-A0002932828-1.pdf?src-supplier=IHS+Markit, ComponentLink2Description=https://datasheet.ciiva.com/7673/1719906-7673177.pdf?src-supplier=Element14, ComponentLink2URL=https://datasheet.ciiva.com/7673/1719906-7673177.pdf?src-supplier=Element14, ComponentLink3Description=https://datasheet.ciiva.com/7673/1719906-7673178.pdf?src-supplier=Element14, ComponentLink3URL=https://datasheet.ciiva.com/7673/1719906-7673178.pdf?src-supplier=Element14, ComponentLink4Description=https://datasheet.ciiva.com/22692/1719906-22692711.pdf?src-supplier=Element14, ComponentLink4URL=https://datasheet.ciiva.com/22692/1719906-22692711.pdf?src-supplier=Element14, ComponentLink5Description=https://datasheet.ciiva.com/22665/1700795-22665701.pdf?src-supplier=Element14, ComponentLink5URL=https://datasheet.ciiva.com/22665/1700795-22665701.pdf?src-supplier=Element14, JESD-609 Code=e3, Manufacturer Part Number=CRCW020110M0FNED, Mounting Technology="Surface Mount", Packaging="Tape and Reel", Pins=2, Pricing="1=0,1, 10=0,024, 50=0,024, 100=0,014, 1000=0,011, 10000=0,006 (USD)", Reach SVHC Compliant=Yes, RoHS=Yes, RoHS Compliant=Yes, Stock=159754, Supplier=Mouser, Supplier 1=Avnet, Supplier Part Number 1=CRCW0201100KFNED, Technology="METAL GLAZE/THICK FILM", Terminal Finish=Nickel, Termination=Wraparound
R900 R907: "Fixed Resistor, Metal Glaze/thick Film, 0.05W, 8200ohm, 30V, 1% +/-Tol, 200ppm/Cel, Surface Mount, 0201", Case/Package=0201, Manufacturer=Vishay, Max Operating Temperature=155°C, Medical Grade MFR=TBD, Min Operating Temperature=-55°C, Package Height=0.23mm, Package Length=0.6mm, Package Shape=Rectangular, Package Style=SMTMeter, Package Width=0.3mm, Power=50mW, Rated Temperature=70°C, Resistor Type="FIXED RESISTOR", Supplier Part Number 1=541-CRCW02018K20FNEDCT-ND, Temperature Coefficient=200ppm/°C, Tolerance=1%, Working Voltage=30V, Category="Chip SMD Resistors", ComponentLink1Description=https://datasheet.ciiva.com:443/pdfs/VipMasterIC/IC/VISH/VISH-S-A0002932828/VISH-S-A0002932828-1.pdf?src-supplier=IHS+Markit, ComponentLink1URL=https://datasheet.ciiva.com:443/pdfs/VipMasterIC/IC/VISH/VISH-S-A0002932828/VISH-S-A0002932828-1.pdf?src-supplier=IHS+Markit, ComponentLink2Description=https://datasheet.ciiva.com/7983/1719906-7983324.pdf?src-supplier=Element14, ComponentLink2URL=https://datasheet.ciiva.com/7983/1719906-7983324.pdf?src-supplier=Element14, ComponentLink3Description=https://datasheet.ciiva.com/7983/1719906-7983323.pdf?src-supplier=Element14, ComponentLink3URL=https://datasheet.ciiva.com/7983/1719906-7983323.pdf?src-supplier=Element14, ComponentLink4Description=https://datasheet.ciiva.com/22692/1719906-22692751.pdf?src-supplier=Element14, ComponentLink4URL=https://datasheet.ciiva.com/22692/1719906-22692751.pdf?src-supplier=Element14, ComponentLink5Description=https://datasheet.ciiva.com/22665/1825492-22665818.pdf?src-supplier=Element14, ComponentLink5URL=https://datasheet.ciiva.com/22665/1825492-22665818.pdf?src-supplier=Element14, ComponentLink6Description=https://datasheet.ciiva.com/2474/crcw0201e3-2474801.pdf?src-supplier=Digikey, ComponentLink6URL=https://datasheet.ciiva.com/2474/crcw0201e3-2474801.pdf?src-supplier=Digikey, ComponentLink7Description=https://datasheet.ciiva.com/2474/crcw0201e3-2474802.pdf?src-supplier=Digikey, ComponentLink7URL=https://datasheet.ciiva.com/2474/crcw0201e3-2474802.pdf?src-supplier=Digikey, ComponentLink8Description=https://datasheet.ciiva.com/2474/crcw0201e3-2474800.pdf?src-supplier=Digikey, ComponentLink8URL=https://datasheet.ciiva.com/2474/crcw0201e3-2474800.pdf?src-supplier=Digikey, ComponentLink9Description=https://datasheet.ciiva.com/22871/70202042-22871422.pdf?src-supplier=Allied+Electronics, ComponentLink9URL=https://datasheet.ciiva.com/22871/70202042-22871422.pdf?src-supplier=Allied+Electronics, ComponentLink10Description=https://datasheet.ciiva.com/3255/crcw0201e3-3255929.pdf?src-supplier=Avnet, ComponentLink10URL=https://datasheet.ciiva.com/3255/crcw0201e3-3255929.pdf?src-supplier=Avnet, Construction=Chip, Manufacturer Part Number=CRCW02018K20FNED, Medical Grade MFR PN=TBD, Mounting Technology="Surface Mount", Pins=2, Reach SVHC Compliant=Yes, Reference Standard=AEC-Q200, RoHS=Yes, RoHS Compliant=Yes, Supplier 1=Digikey, Technology="METAL GLAZE/THICK FILM", Terminal Finish=Nickel, Termination=Wraparound
R901 R908: "Fixed Resistor, Metal Glaze/thick Film, 0.05W, 59000ohm, 30V, 1% +/-Tol, 200ppm/Cel, Surface Mount, 0201", Case/Package=0201, Manufacturer=Vishay, Max Operating Temperature=155°C, Medical Grade MFR=TBD, Min Operating Temperature=-55°C, Package Height=0.23mm, Package Length=0.6mm, Package Shape=Rectangular, Package Style=SMTMeter, Package Width=0.3mm, Power=50mW, Rated Temperature=70°C, Resistor Type="FIXED RESISTOR", Supplier Part Number 1=541-CRCW020159K0FNEDCT-ND, Temperature Coefficient=200ppm/°C, Tolerance=1%, Working Voltage=30V, Category="Chip SMD Resistors", ComponentLink1Description=https://datasheet.ciiva.com:443/pdfs/VipMasterIC/IC/VISH/VISH-S-A0002932828/VISH-S-A0002932828-1.pdf?src-supplier=IHS+Markit, ComponentLink1URL=https://datasheet.ciiva.com:443/pdfs/VipMasterIC/IC/VISH/VISH-S-A0002932828/VISH-S-A0002932828-1.pdf?src-supplier=IHS+Markit, ComponentLink2Description=https://datasheet.ciiva.com/7983/1719906-7983324.pdf?src-supplier=Element14, ComponentLink2URL=https://datasheet.ciiva.com/7983/1719906-7983324.pdf?src-supplier=Element14, ComponentLink3Description=https://datasheet.ciiva.com/7983/1719906-7983323.pdf?src-supplier=Element14, ComponentLink3URL=https://datasheet.ciiva.com/7983/1719906-7983323.pdf?src-supplier=Element14, ComponentLink4Description=https://datasheet.ciiva.com/22692/1719906-22692751.pdf?src-supplier=Element14, ComponentLink4URL=https://datasheet.ciiva.com/22692/1719906-22692751.pdf?src-supplier=Element14, ComponentLink5Description=https://datasheet.ciiva.com/22665/1825492-22665818.pdf?src-supplier=Element14, ComponentLink5URL=https://datasheet.ciiva.com/22665/1825492-22665818.pdf?src-supplier=Element14, ComponentLink6Description=https://datasheet.ciiva.com/2474/crcw0201e3-2474801.pdf?src-supplier=Digikey, ComponentLink6URL=https://datasheet.ciiva.com/2474/crcw0201e3-2474801.pdf?src-supplier=Digikey, ComponentLink7Description=https://datasheet.ciiva.com/2474/crcw0201e3-2474802.pdf?src-supplier=Digikey, ComponentLink7URL=https://datasheet.ciiva.com/2474/crcw0201e3-2474802.pdf?src-supplier=Digikey, ComponentLink8Description=https://datasheet.ciiva.com/2474/crcw0201e3-2474800.pdf?src-supplier=Digikey, ComponentLink8URL=https://datasheet.ciiva.com/2474/crcw0201e3-2474800.pdf?src-supplier=Digikey, ComponentLink9Description=https://datasheet.ciiva.com/22871/70202042-22871422.pdf?src-supplier=Allied+Electronics, ComponentLink9URL=https://datasheet.ciiva.com/22871/70202042-22871422.pdf?src-supplier=Allied+Electronics, ComponentLink10Description=https://datasheet.ciiva.com/3255/crcw0201e3-3255929.pdf?src-supplier=Avnet, ComponentLink10URL=https://datasheet.ciiva.com/3255/crcw0201e3-3255929.pdf?src-supplier=Avnet, Construction=Chip, Manufacturer Part Number=CRCW020159K0FNED, Medical Grade MFR PN=TBD, Mounting Technology="Surface Mount", Pins=2, Reach SVHC Compliant=Yes, Reference Standard=AEC-Q200, RoHS=Yes, RoHS Compliant=Yes, Supplier 1=Digikey, Technology="METAL GLAZE/THICK FILM", Terminal Finish=Nickel, Termination=Wraparound
R910 R912: "Fixed Resistor, Metal Glaze/thick Film, 0.05W, 200000ohm, 30V, 1% +/-Tol, 200ppm/Cel, Surface Mount, 0201", Case/Package=0201, Manufacturer=Vishay, Max Operating Temperature=155°C, Medical Grade MFR=TBD, Min Operating Temperature=-55°C, Package Height=0.23mm, Package Length=0.6mm, Package Shape=Rectangular, Package Style=SMTMeter, Package Width=0.3mm, Power=50mW, Rated Temperature=70°C, Resistor Type="FIXED RESISTOR", Supplier Part Number=541-2945-1-ND, Temperature Coefficient=200ppm/°C, Tolerance=1%, Working Voltage=30V, Category="Chip SMD Resistors", ComponentLink1Description=https://datasheet.ciiva.com:443/pdfs/VipMasterIC/IC/VISH/VISH-S-A0002932828/VISH-S-A0002932828-1.pdf?src-supplier=IHS+Markit, ComponentLink1URL=https://datasheet.ciiva.com:443/pdfs/VipMasterIC/IC/VISH/VISH-S-A0002932828/VISH-S-A0002932828-1.pdf?src-supplier=IHS+Markit, ComponentLink2Description=https://datasheet.ciiva.com/7714/1719906-7714137.pdf?src-supplier=Element14, ComponentLink2URL=https://datasheet.ciiva.com/7714/1719906-7714137.pdf?src-supplier=Element14, ComponentLink3Description=https://datasheet.ciiva.com/7714/1719906-7714138.pdf?src-supplier=Element14, ComponentLink3URL=https://datasheet.ciiva.com/7714/1719906-7714138.pdf?src-supplier=Element14, ComponentLink4Description=https://datasheet.ciiva.com/2577/crcw0201e3-2577332.pdf?src-supplier=Digikey, ComponentLink4URL=https://datasheet.ciiva.com/2577/crcw0201e3-2577332.pdf?src-supplier=Digikey, ComponentLink5Description=https://datasheet.ciiva.com/8961/crcw0201e3-8961381.pdf?src-supplier=Avnet, ComponentLink5URL=https://datasheet.ciiva.com/8961/crcw0201e3-8961381.pdf?src-supplier=Avnet, ComponentLink6Description=https://datasheet.ciiva.com/22675/1700795-22675066.pdf?src-supplier=Element14, ComponentLink6URL=https://datasheet.ciiva.com/22675/1700795-22675066.pdf?src-supplier=Element14, ComponentLink7Description=https://datasheet.ciiva.com/22692/1719906-22692766.pdf?src-supplier=Element14, ComponentLink7URL=https://datasheet.ciiva.com/22692/1719906-22692766.pdf?src-supplier=Element14, Construction=Chip, JESD-609 Code=e3, Manufacturer Part Number=CRCW0201200KFNED, Medical Grade MFR PN=TBD, Mounting Technology="Surface Mount", Packaging="Tape and Reel", Pins=2, Pricing="1=0,1, 10=0,037, 50=0,0242, 100=0,0204, 500=0,01426, 1000=0,01241, 5000=0,00924 (USD)", Reach SVHC Compliant=Yes, Reference Standard=AEC-Q200, RoHS=Yes, RoHS Compliant=Yes, Stock=43796, Supplier=Digikey, Supplier 1=Digikey, Supplier Part Number 1=541-2945-1-ND, Technology="METAL GLAZE/THICK FILM", Terminal Finish=Nickel, Termination=Wraparound